# Altium PCB PCB1.PcbDoc
Units mm, origin at the board's own origin, x right, y up, seen from the top; angles counter-clockwise.
Board outline 152.4 x 101.6 mm, 2 copper layers (Top Layer, Bottom Layer); 26 components, 22 nets, 128 pads, 0 vias.
Unrouted connection lines stored in the file: 2.
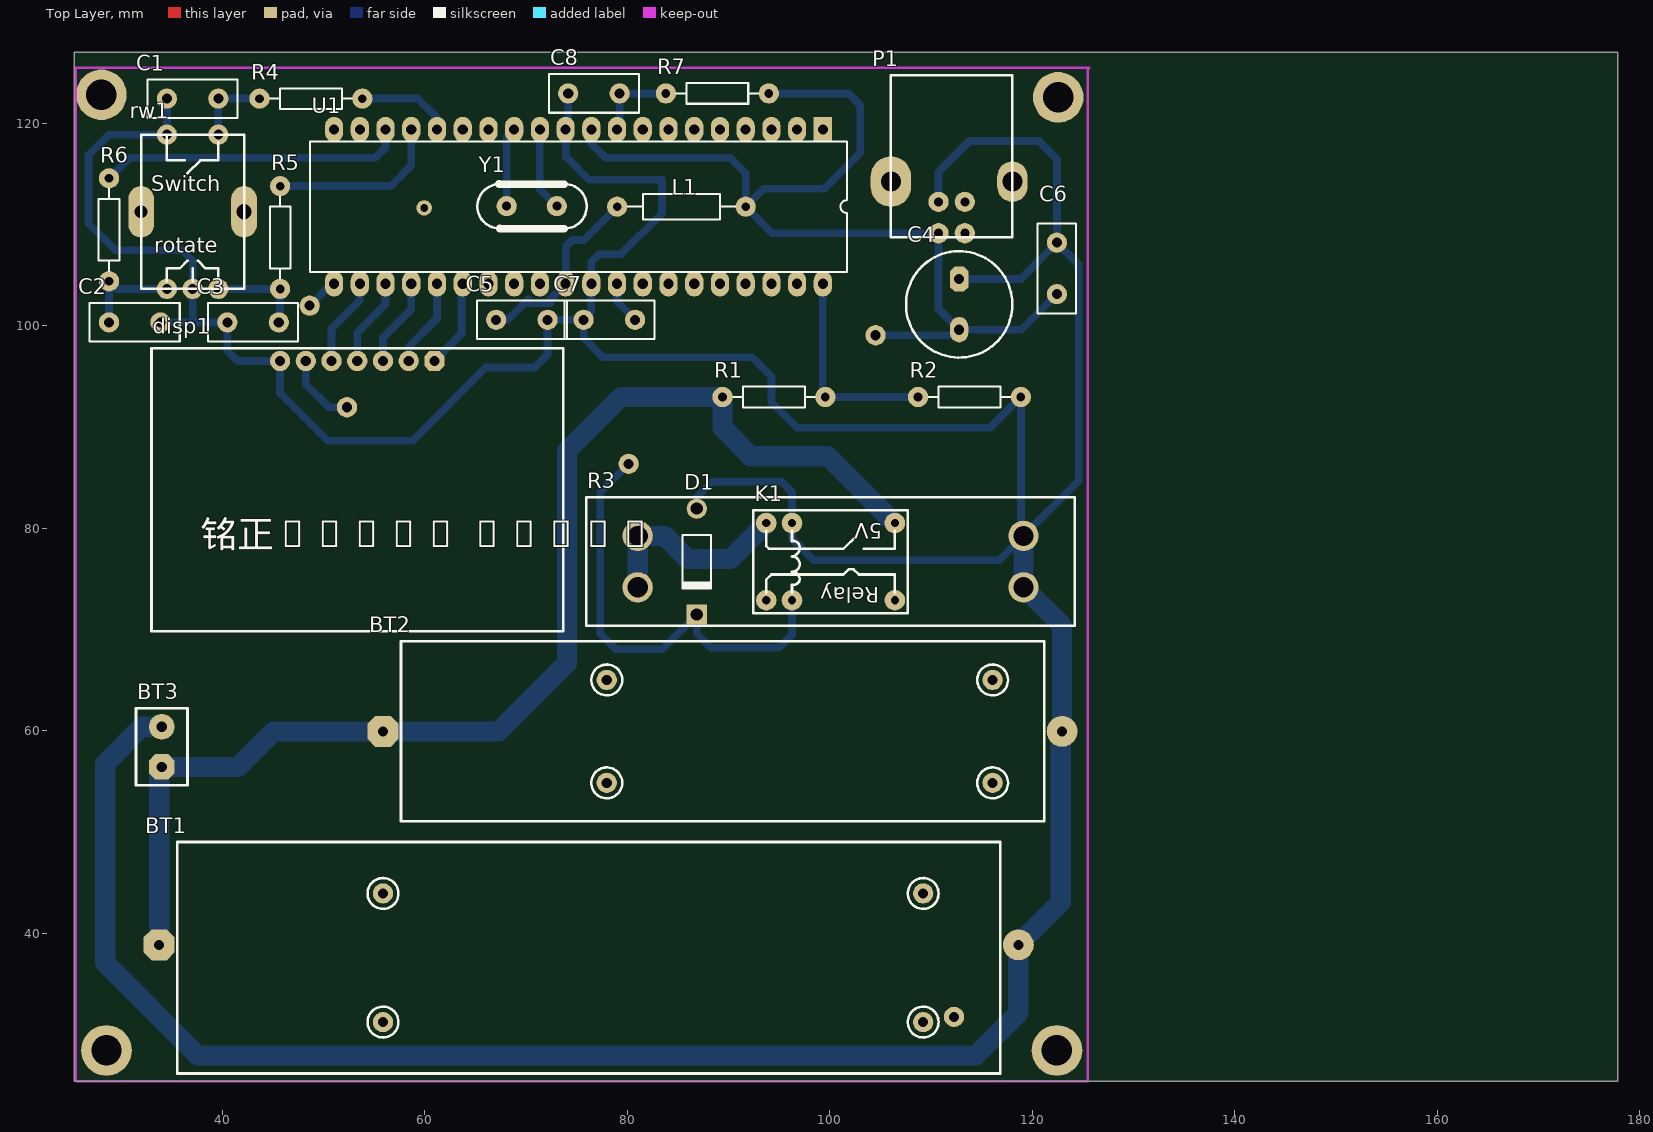
[diagram p0: Top Layer view]
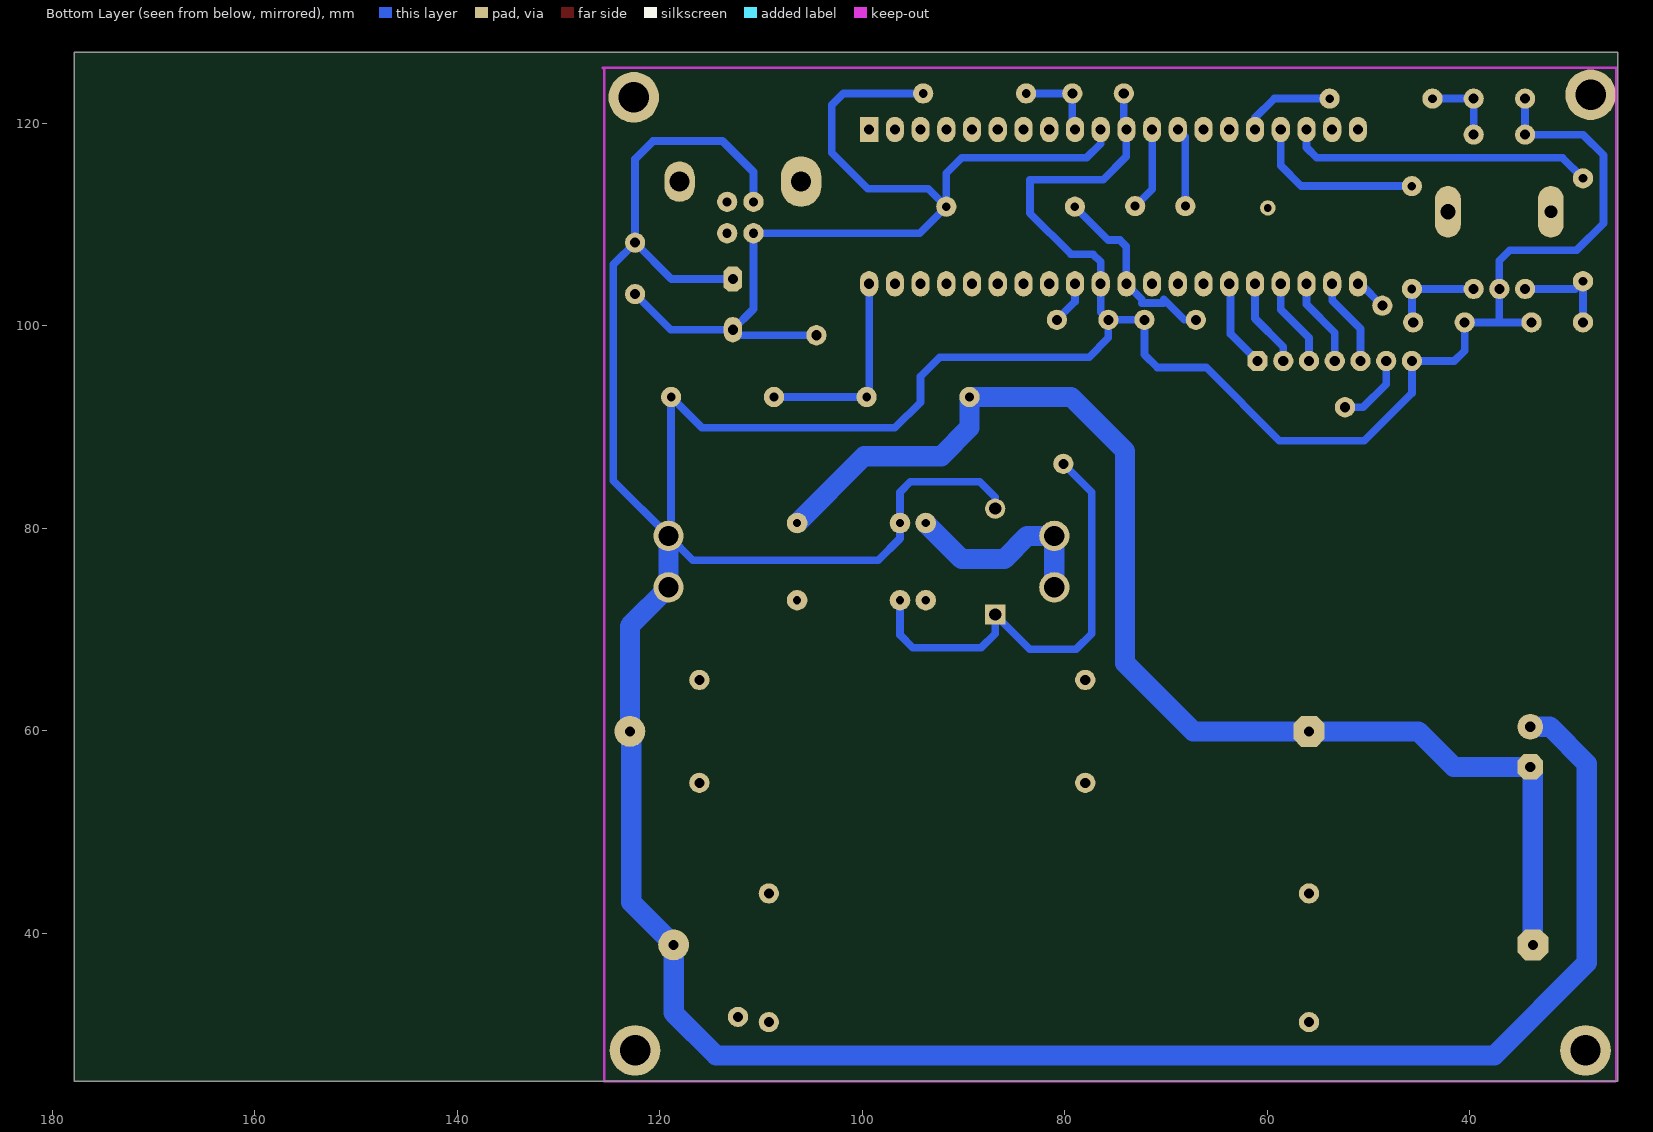
[diagram p1: Bottom Layer view, seen from below]

## Layer stack, top to bottom
Top Layer: signal copper 0.0356
Dielectric: dielectric 0.32, FR-4, Dk 4.8
Bottom Layer: signal copper 0.0356

## Board outline
25.4,25.4 177.8,25.4 177.8,127 25.4,127

## Design rules (kind name [scope] priority, off if disabled: settings)
Clearance [All] p1: gap=0.254
PolygonConnect [All] p1: connectstyle=Relief reliefconductorwidth=0.254 reliefentries=4 polygonreliefangle="90 Angle"
RoutingVias [All] p1: holewidth=0.711 width=1.27 viastyle="Through Hole" minholewidth=0.711 minwidth=1.27 maxholewidth=0.711 maxwidth=1.27
SilkscreenOverComponentPads [All] p1: minsilkscreentomaskgap=0.254
SolderMaskExpansion [All] p1: expansion=0.102
Width [All] p1: maxlimit=0.762 minlimit=0.762 preferedwidth=0.254
27 further rules are at their usual default settings.

## Components (designator, comment, footprint, x,y, rotation, side; value= is the part's Value field where it differs from the comment)
BT1 "18650" 18650battery 76.2,37.592 r180 top
BT2 "AA" aabattery 89.408,59.944 r180 top
BT3 "other" Header2_3.96 34.036,58.42 r270 top
C1 "Cap" RAD-0.2 37.084,122.428 r180 top
C2 "Cap" RAD-0.2 31.369,100.33 r0 top
C3 "Cap" RAD-0.2 43.053,100.33 r180 top
C4 "Cap Pol1" RB5-10.5 112.776,102.108 r90 top
C5 "Cap" RAD-0.2 69.596,100.584 r180 top
C6 "Cap" RAD-0.2 122.428,105.664 r90 top
C7 "Cap" RAD-0.2 78.232,100.584 r0 top
C8 "Cap" RAD-0.2 76.708,122.936 r0 top
D1 "1n4148" DIO10.46-5.3x2.8 86.868,76.708 r270 top
disp1 "mzl05_12864" mzl05_12864 53.34,83.82 r0 top
K1 "Relay-DPST" 5VRELAY 100.076,76.708 r90 top
L1 "Inductor" AXIAL-0.5 85.344,111.76 r0 top
P1 "Header 4" USB_B 112.268,116.84 r0 top
R1 "Res2" AXIAL-0.4 94.488,92.964 r180 top
R2 "Res2" AXIAL-0.4 113.792,92.964 r180 top
R3 "15W" R_15W 100.076,76.708 r180 top
R4 "Res2" AXIAL-0.4 48.768,122.428 r0 top
R5 "Res2" AXIAL-0.4 45.72,108.712 r90 top
R6 "Res2" AXIAL-0.4 28.829,109.474 r90 top
R7 "Res2" AXIAL-0.4 88.9,122.936 r0 top
rw1 "EC11" rotate_switch 37.084,111.252 r0 top
U1 "ATmega16L-8PC" 40P6 75.184,111.76 r180 top
Y1 "20M" XTAL 70.612,111.76 r0 top

## Footprints (in the part's own frame and the unit in brackets; to place one, negate y for a bottom-side part, rotate by r counter-clockwise, add the part's x,y. Pads: shape width x height; smd on the part's side, far side on the other; paste and mask are expansions set on the pad)
5VRELAY [mil] "5V继电器"
  round 80 hole 31.5: 1(150,250) 2(150,-250) 3(-150,250) 4(-150,-250) 5(-150,150) 6(150,150)
  silkscreen extent -200,-300 200,300
40P6 [mm] "DIP; 40 Leads; Row Spacing 15.24 mm; Pitch 2.54 mm"
  rect 1.8x2.5 hole 1 mask+0.102: 1(-24.13,-7.62)
  oval 1.8x2.5 hole 1 mask+0.102: 2(-21.59,-7.62) 3(-19.05,-7.62) 4(-16.51,-7.62) 5(-13.97,-7.62) 6(-11.43,-7.62) 7(-8.89,-7.62) 8(-6.35,-7.62) 9(-3.81,-7.62) 10(-1.27,-7.62) 11(1.27,-7.62) 12(3.81,-7.62) 13(6.35,-7.62) 14(8.89,-7.62) 15(11.43,-7.62) 16(13.97,-7.62) 17(16.51,-7.62) 18(19.05,-7.62) 19(21.59,-7.62) 20(24.13,-7.62) 21(24.13,7.62) 22(21.59,7.62) 23(19.05,7.62) 24(16.51,7.62) 25(13.97,7.62) 26(11.43,7.62) 27(8.89,7.62) 28(6.35,7.62) 29(3.81,7.62) 30(1.27,7.62) 31(-1.27,7.62) 32(-3.81,7.62) 33(-6.35,7.62) 34(-8.89,7.62) 35(-11.43,7.62) 36(-13.97,7.62) 37(-16.51,7.62) 38(-19.05,7.62) 39(-21.59,7.62) 40(-24.13,7.62)
  silkscreen extent -26.5,-6.45 26.5,6.45
18650battery [mm] "18650电池"
  round 2 hole 1: 0(-33.02,-6.35) 0(-33.02,6.35) 0(20.32,-6.35) 0(20.32,6.35)
  oct 3.048x3.048 hole 1: 1(42.418,-1.27)
  round 3.048 hole 1: 2(-42.418,-1.27)
  silkscreen extent -40.64,-11.43 40.64,11.43
aabattery [mm] "5号电池"
  round 2 hole 1: 0(-26.67,-5.08) 0(-26.67,5.08) 0(11.43,-5.08) 0(11.43,5.08) 12(-22.86,28.194)
  oct 3.048x3.048 hole 1: 1(33.528,0)
  round 3.048 hole 1: 2(-33.528,0)
  silkscreen extent -31.75,-8.89 31.75,8.89
AXIAL-0.4 [mm] "Axial Device, Thru-Hole; 2 Leads; 0.4 in Pin Spacing"
  round 2 hole 0.85: 1(-5.08,0) 2(5.08,0)
  silkscreen extent -4.06,-1.02 4.06,1.02
AXIAL-0.5 [mm] "Axial Device, Thru-Hole; 2 Leads; 0.5 in Pin Spacing"
  round 2 hole 0.85: 1(-6.35,0) 2(6.35,0)
  silkscreen extent -5.33,-1.27 5.33,1.27
DIO10.46-5.3x2.8 [mm] "Diode, Axial; Body 5.2 x 2.7 mm (LxDia. max), Lead Dia. 0.86 mm (max)"
  round 2 hole 1.2: 1(-5.23,0)
  rect 2x2 hole 1.2: 2(5.23,0)
  silkscreen extent -2.65,-1.42 2.75,1.4
Header2_3.96 [mm]
  oct 2.54x2.54 hole 1: 1(1.98,0)
  round 2.54 hole 1: 2(-1.98,0)
  silkscreen extent -3.81,-2.54 3.81,2.54
mzl05_12864 [mm]
  oct 2x2 hole 1: 1(7.62,12.7)
  round 2 hole 1: 2(5.08,12.7) 3(2.54,12.7) 4(0,12.7) 5(-2.54,12.7) 6(-5.08,12.7) 7(-7.62,12.7)
  silkscreen extent -20.32,-13.97 20.32,13.97
R_15W [mm] "15W水泥电阻"
  round 3 hole 2: 1(-19.05,-2.54) 1(-19.05,2.54) 2(19.05,-2.54) 2(19.05,2.54)
  silkscreen extent -24.13,-6.35 24.13,6.35
RAD-0.2 [mm] "Radial Cap, Thru-Hole; 2 Leads; 0.2 in Pin Spacing"
  round 2 hole 1: 1(-2.54,0) 2(2.54,0)
  silkscreen extent -4.44,-1.91 4.44,1.91
RB5-10.5 [mm] "Motor, General Kind; 2 Leads"
  oval 2.5x1.8 hole 1 mask+0.102: 1(-2.5,0)
  oct 2.5x1.8 hole 1 mask+0.102: 2(2.5,0)
  silkscreen extent -5.25,-5.25 5.25,5.25
rotate_switch [mm] "带开关旋转编码器"
  oval 2.54x5.08 hole 1.27: 0(-5.08,0)
  oval 2.54x5.08 hole 1.5: 0(5.08,0)
  round 2 hole 1: 1(0,-7.62) 2(-2.54,-7.62) 3(2.54,-7.62) 4(-2.54,7.62) 5(2.54,7.62)
  silkscreen extent -5.08,-7.62 5.08,7.62
USB_B [mm]
  oval 4x5 hole 2: 0(-6.234,-2.607)
  oval 3x4 hole 2: 0(5.766,-2.607)
  round 2 hole 0.9: 1(-1.534,-7.707) 2(1.066,-7.707) 3(1.066,-4.607) 4(-1.534,-4.607)
  silkscreen extent -6.23,-8.11 5.77,7.89
XTAL [mm]
  round 2 hole 0.9: 1(-2.517,0.055) 2(2.436,0.055)
  silkscreen extent -5.41,-2.18 5.39,2.24

## Part data
BT1 BT2 BT3: library part Battery, "Multicell Battery"
C1 C2 C3 C5 C6 C7 C8: "Capacitor"
C4: "Polarized Capacitor (Radial)"
D1: library part "Diode 1N4001", "1 Amp General Purpose Rectifier"
K1: "Dual-Pole Single-Throw Relay"
P1: "Header, 4-Pin"
R1 R2 R4 R5 R6 R7: "Resistor"
R3: library part Res2, "Resistor"
rw1: library part rotate_switch
U1: "8-Bit AVR Microcontroller with 16K Bytes of In-System Programmable Flash Memory"
Y1: library part XTAL, "Crystal Oscillator"

## Free pads (board coordinates)
  round 1.524 hole 0.762: 0(59.944,111.633)
  round 5 hole 3: 0(122.428,28.448) 1(28.575,28.448) 2(122.555,122.555) 3(28.067,122.809)
  round 2 hole 1: 1(48.641,101.981) 1(80.137,86.36) 2(52.324,91.948) 3(104.521,99.06)

## Nets (pads, with @x,y where several pads share a name; then routed paths per layer and width w, separated by ;. In a path a pad name is that pad's centre, name@x,y a point inside that pad or via, vN(x,y) a via of type N, cw(c..) or ccw(c..) an arc to the next point about the centre after c; other vN are vias at no path point)
GND: BT1.2 BT2.2 BT3.2 C1.2 C2.2 C3.2 C4.2 C5.1 C6.2 C7.1 C8.1 D1.1 disp1.7 K1.6 P1.4 R2.1 R3.1 rw1.1 rw1.4 U1.11 U1.31 | length 476.6
  Bottom Layer w0.762: C2.2 37.084,100.33 ; C1.2 rw1.4 28.829,118.872 26.797,116.84 26.797,110.109 29.464,107.442 36.068,107.442 37.084,106.426 rw1.1 37.084,100.33 ; U1.11@74.041,119.253 U1.11 ; C8.1 74.168,119.634 U1.11 ; D1.1 86.868,83.058 88.392,84.582 95.25,84.582 96.266,83.566 K1.6 96.266,78.994 98.425,76.835 116.713,76.835 R3.1@119.126,79.248 ; P1.4 110.734,115.179 113.792,118.237 120.65,118.237 122.428,116.459 C6.2 ; C4.2 118.832,104.608 C6.2 ; C6.2@122.428,107.95 C6.2 ; BT2.2@122.809,59.817 BT2.2 ; 37.084,100.33 C3.2 40.513,97.536 41.529,96.52 disp1.7 45.72,93.345 50.419,88.646 58.801,88.646 66.04,95.885 70.866,95.885 72.136,97.155 C5.1 C7.1 ; U1.11 73.914,116.713 76.2,114.427 83.439,114.427 83.439,111.125 79.375,107.061 77.216,107.061 76.454,106.299 U1.31 76.454,101.346 C7.1 ; C7.1 75.692,98.806 77.597,96.901 92.329,96.901 94.234,94.996 94.234,92.456 96.774,89.916 115.824,89.916 R2.1 118.872,79.502 R3.1@119.126,79.248 ; R3.1@119.126,79.248 124.587,84.709 124.587,106.045 C6.2
  Bottom Layer w2: BT3.2 32.079,60.4 28.448,56.769 28.448,37.084 37.592,27.94 114.427,27.94 118.618,32.131 BT1.2 122.809,43.053 BT2.2@122.809,59.817 ; R3.1@119.126,79.248 119.126,74.168 122.936,70.358 BT2.2
NetBT1_1: BT1.1 BT2.1 BT3.1 K1.2 R1.2 | length 124.4
  Bottom Layer w0.762: BT3.1@33.782,56.186 BT3.1
  Bottom Layer w2: BT1.1 BT3.1@33.782,56.186 ; BT3.1 41.581,56.44 45.085,59.944 BT2.1 67.31,59.944 74.041,66.675 74.041,87.63 79.375,92.964 R1.2 89.408,89.916 92.202,87.122 99.822,87.122 K1.2
NetC1_1: C1.1 R4.1 rw1.5 | length 7.5
  Bottom Layer w0.762: rw1.5 C1.1 R4.1@43.561,122.428
NetC2_1: C2.1 R6.1 rw1.2 | length 10.1
  Bottom Layer w0.762: C2.1 R6.1 29.591,103.632 rw1.2
NetC3_1: C3.1 R5.1 rw1.3 | length 9.3
  Bottom Layer w0.762: rw1.3 R5.1 C3.1@45.72,100.457
NetC5_2: C5.2 L1.1 U1.30 | length 18.7
  Bottom Layer w0.762: C5.2 68.199,100.584 70.231,102.616 ; 70.231,102.235 72.39,102.235 ; 72.39,102.616 U1.30 73.914,107.823 74.549,108.458 75.692,108.458 L1.1
NetC7_2: C7.2 U1.32 | length 4.3
  Bottom Layer w0.762: U1.32 78.994,102.362 C7.2
NetC8_2: C8.2 R7.1 U1.9 | length 8.2
  Bottom Layer w0.762: U1.9 79.248,119.634 C8.2 R7.1
NetD1_2: D1.2 K1.5 pad.1@48.641,101.981 pad.1@80.137,86.36 U1.21 | length 48.6
  Bottom Layer w0.762: pad.1@48.641,101.981 50.8,104.14 U1.21 ; pad.1@80.137,86.36 77.343,83.566 77.343,69.596 78.89,68.049 83.439,68.049 D1.2 86.868,69.596 88.265,68.199 94.996,68.199 96.266,69.469 K1.5
Netdisp1_1: disp1.1 U1.26 | length 8.8
  Bottom Layer w0.762: disp1.1 63.627,99.187 63.627,104.013 U1.26
Netdisp1_2: disp1.2 U1.25 | length 8.8
  Bottom Layer w0.762: disp1.2 58.42,97.917 61.214,100.711 U1.25
Netdisp1_3: disp1.3 U1.24 | length 8.8
  Bottom Layer w0.762: disp1.3 55.88,98.806 58.674,101.6 U1.24
Netdisp1_4: disp1.4 U1.23 | length 8.8
  Bottom Layer w0.762: disp1.4 53.34,99.314 56.134,102.108 U1.23
Netdisp1_5: disp1.5 U1.22 | length 8.8
  Bottom Layer w0.762: disp1.5 50.8,99.695 53.594,102.489 U1.22
NetK1_1: K1.1 R3.2 | length 20.2
  Bottom Layer w2: R3.2@81.026,74.168 81.026,79.248 83.693,79.248 85.979,76.962 90.17,76.962 K1.1
NetR1_1: R1.1 R2.2 U1.40 | length 20.4
  Bottom Layer w0.762: U1.40 99.314,93.218 R1.1 R2.2
NetR4_2: R4.2 U1.16 | length 9.3
  Bottom Layer w0.762: R4.2 59.309,122.428 61.214,120.523 U1.16
NetR5_2: R5.2 U1.17 | length 17.4
  Bottom Layer w0.762: R5.2 56.642,113.792 58.674,115.824 U1.17
NetR6_2: R6.2 U1.18 | length 30.3
  Bottom Layer w0.762: R6.2 30.861,116.586 55.118,116.586 56.134,117.602 U1.18
NetU1_12: U1.12 Y1.2 | length 8.3
  Bottom Layer w0.762: U1.12 71.374,113.489 Y1.2
NetU1_13: U1.13 Y1.1 | length 7.9
  Bottom Layer w0.762: Y1.1 68.095,118.641 U1.13
VCC: C4.1 C6.1 disp1.6 L1.2 P1.1 pad.2@52.324,91.948 pad.3@104.521,99.06 R7.2 U1.10 | length 106.2
  Bottom Layer w0.762: disp1.6 48.26,94.234 50.546,91.948 pad.2@52.324,91.948 ; U1.10 76.454,117.983 77.851,116.586 90.17,116.586 91.694,115.062 L1.2 ; R7.2 101.854,122.936 102.997,121.793 102.997,117.094 99.441,113.538 93.472,113.538 L1.2 ; pad.3@104.521,99.06 112.228,99.06 C4.1 ; C6.1 118.912,99.608 C4.1 ; L1.2 94.321,109.133 P1.1 110.734,101.65 C4.1
pads on no net: BT1.0 BT2.0 BT2.12 K1.3 K1.4 P1.0 P1.2 P1.3 rw1.0 U1.1 U1.2 U1.3 U1.4 U1.5 U1.6 U1.7 U1.8 U1.14 U1.15 U1.19 U1.20 U1.27 U1.28 U1.29 U1.33 U1.34 U1.35 U1.36 U1.37 U1.38 U1.39

## Keep-outs
Keep-Out Layer:
  lines w0.254: 25.527,25.527 25.527,125.476 125.603,125.476 125.476,125.349 125.476,25.4 25.654,25.4 25.527,25.527

## Text inside footprints (layer, text, board x,y; h text height)
disp1: Top Overlay "铭正mzl05 12864" at 37.846,77.216 h4.57
K1: Top Overlay "Relay" at 104.902,74.168 h1.52 r180; Top Overlay "5V" at 105.156,80.518 h1.52 r180
rw1: Top Overlay "Switch" at 33.02,113.284 h1.52; Top Overlay "rotate" at 33.274,107.188 h1.52